# Altium PCB MB.PcbDoc
Units mm, origin at the board's own origin, x right, y up, seen from the top; angles counter-clockwise.
Board outline 125 x 96.25 mm, 2 copper layers (Top Layer, Bottom Layer); 31 components, 34 nets, 225 pads, 0 vias.
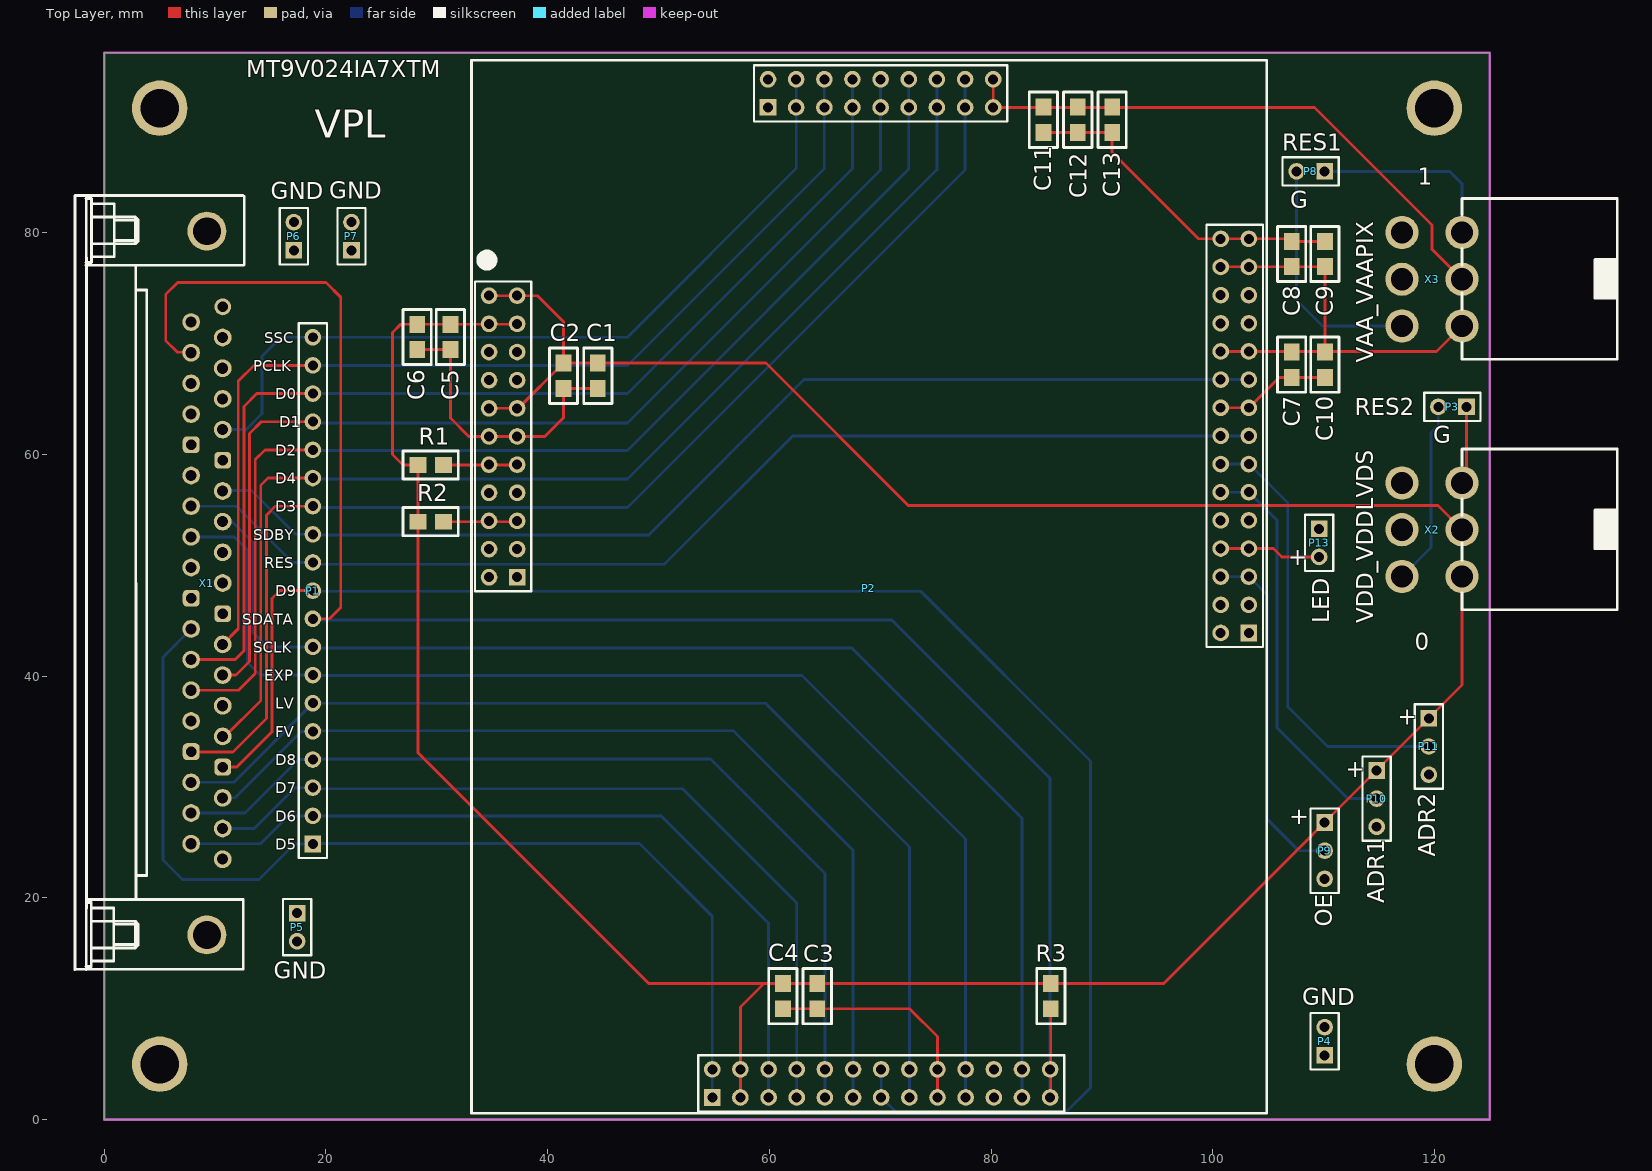
[diagram p0: Top Layer view]
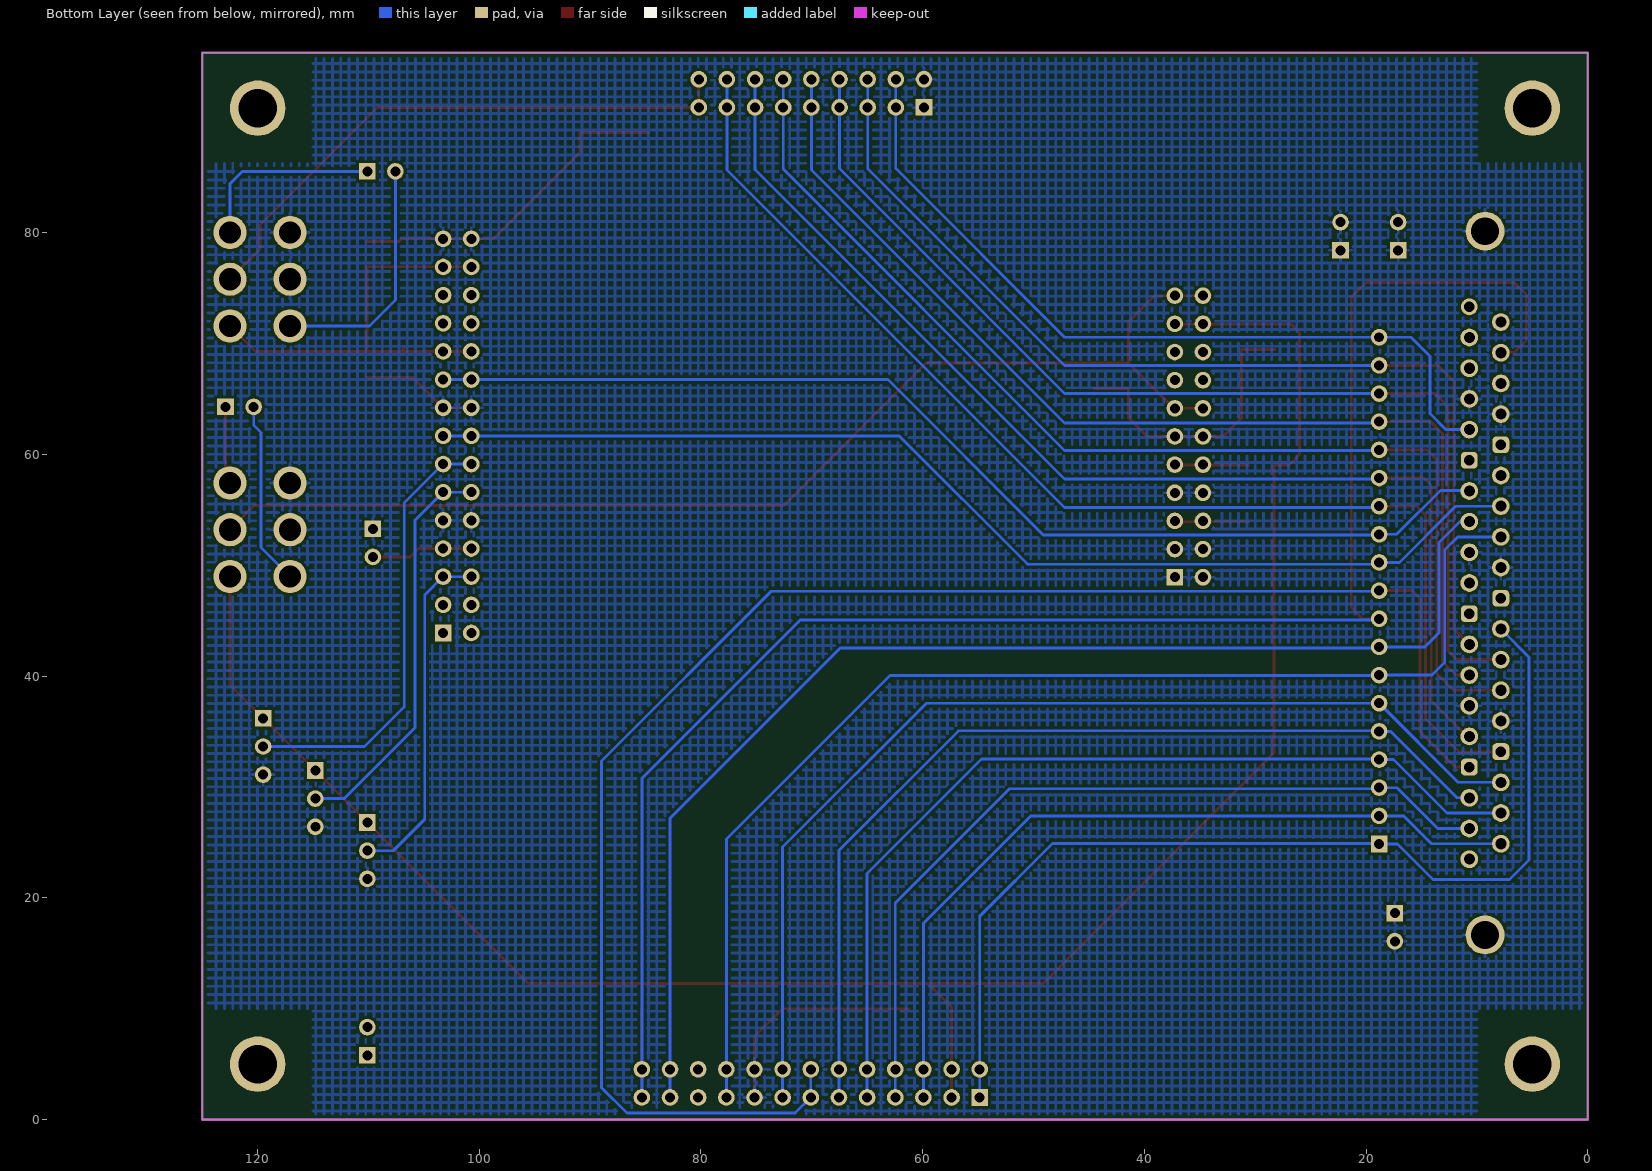
[diagram p1: Bottom Layer view, seen from below]

## Layer stack, top to bottom
Top Solder: solder mask 0.0102, Solder Resist, Dk 3.5
Top Layer: signal copper 0.0356
Dielectric 1: dielectric 0.32, FR-4, Dk 4.8
Bottom Layer: signal copper 0.0356
Bottom Solder: solder mask 0.0102, Solder Resist, Dk 3.5

## Board outline
0,0 125,0 125,96.25 0,96.25

## Design rules (kind name [scope] priority, off if disabled: settings)
Clearance [All] p1: gap=0.254
PolygonConnect [All] p1: connectstyle=Relief reliefconductorwidth=0.254 reliefentries=4 polygonreliefangle="90 Angle" airgapwidth=0.254
RoutingVias [All] p1: holewidth=0.711 width=1.27 viastyle="Through Hole" minholewidth=0.711 minwidth=1.27 maxholewidth=0.711 maxwidth=1.27
SolderMaskExpansion [All] p1: expansion=0.102
Width [All] p1: maxlimit=0.254 minlimit=0.254 preferedwidth=0.254
29 further rules are at their usual default settings.

## Components (designator, comment, footprint, x,y, rotation, side; value= is the part's Value field where it differs from the comment)
C1 "0,1 мк" CAP_SMALL 45.8,64.6 r90 top
C2 "0,1 мк" CAP_SMALL 42.7,64.6 r90 top
C3 "0,1 мк" CAP_SMALL 65.595,8.631 r90 top
C4 "0,1 мк" CAP_SMALL 62.495,8.631 r90 top
C5 "0,1 мк" CAP_SMALL 32.5,68.1 r90 top
C6 "0,1 мк" CAP_SMALL 29.5,68.1 r90 top
C7 "0,1 мк" CAP_SMALL 108.4,65.6 r90 top
C8 "0,1 мк" CAP_SMALL 105.86,80.6 r270 top
C9 "0,1 мк" CAP_SMALL 108.86,80.6 r270 top
C10 "0,1 мк" CAP_SMALL 111.4,65.6 r90 top
C11 "0,1 мк" CAP_SMALL 86,87.7 r90 top
C12 "0,1 мк" CAP_SMALL 89.1,87.7 r90 top
C13 "1 мк" CAP_SMALL 92.2,87.7 r90 top
P1 "Header 19" HDR1X19 18.81,24.863 r90 top
P2 "MEZ_MT9V024IA7XTM" MEZ_MT9V024IA7XTM 34.71,74.332 r0 top
P3 "RES2" HDR1X2 122.9,64.3 r180 top
P4 "GND" HDR1X2 110.1,5.8 r90 top
P5 "GND" HDR1X2 17.4,18.626 r270 top
P6 "GND" HDR1X2 17.1,78.426 r90 top
P7 "GND" HDR1X2 22.3,78.426 r90 top
P8 "RES1" HDR1X2 110.109,85.547 r180 top
P9 "OE" HDR1X3 110.1,26.8 r270 top
P10 "ADR1" HDR1X3 114.8,31.5 r270 top
P11 "ADR2" HDR1X3 119.5,36.2 r270 top
P13 "LED" HDR1X2 109.6,53.3 r270 top
R1 "1к" RES 26.966,60.3 r270 top
R2 "1к" RES 31.93,52.7 r90 top
R3 "1,5к" RES 86.639,13.62 r180 top
X1 "CHEAP_CON_37_FEMALE" CHEAP_CONN_FEMALE 9.26,16.659 r90 top
X2 "VDD_VDDLVDS" POWER 122.5,49 r270 top
X3 "VAA_VAAPIX" POWER 122.5,71.6 r270 top

## Footprints (in the part's own frame and the unit in brackets; to place one, negate y for a bottom-side part, rotate by r counter-clockwise, add the part's x,y. Pads: shape width x height; smd on the part's side, far side on the other; paste and mask are expansions set on the pad)
CAP_SMALL [mil] "FROM_MAX"
  rect 60x55.98 smd: 1(53.71,50) 2(143.71,50)
  silkscreen extent 1,0 197,100, body extent 20,18 178,82, height 100
CHEAP_CONN_FEMALE [mm] "CHEAP_CONN_FEMALE"
  round 1.6 hole 1: 1(6.833,-1.422) 2(9.601,-1.422) 3(12.37,-1.422) 5(17.907,-1.422) 6(20.676,-1.422) 7(23.444,-1.422) 8(26.213,-1.422) 10(31.75,-1.422) 11(34.519,-1.422) 12(37.287,-1.422) 13(40.056,-1.422) 15(45.593,-1.422) 16(48.362,-1.422) 17(51.13,-1.422) 18(53.899,-1.422) 20(8.23,1.422) 21(10.998,1.422) 22(13.767,1.422) 24(19.304,1.422) 25(22.073,1.422) 26(24.841,1.422) 27(27.61,1.422) 29(33.147,1.422) 30(35.916,1.422) 31(38.684,1.422) 32(41.453,1.422) 34(46.99,1.422) 35(49.759,1.422) 36(52.527,1.422) 37(55.296,1.422)
  rrect50% 1.524x1.524 hole 0.965: 4(15.138,-1.422) 9(28.981,-1.422) 14(42.824,-1.422) 23(16.535,1.422) 28(30.378,1.422) 33(44.221,1.422)
  round 1.524 hole 0.965: 19(56.667,-1.422)
  round 3.5 hole 2.5: 38(0,0) 39(63.5,0)
  silkscreen extent -3.11,-3.36 66.72,11.92
HDR1X2 [mm] "Connector; Header; 2 Position"
  rect 1.5x1.5 hole 0.9: 1(0,0)
  round 1.5 hole 0.9: 2(2.54,0)
  silkscreen extent -1.27,-1.27 3.81,1.27
HDR1X3 [mm] "Connector; Header; 3 Position"
  rect 1.5x1.5 hole 0.9: 1(0,0)
  round 1.5 hole 0.9: 2(2.54,0) 3(5.08,0)
  silkscreen extent -1.27,-1.27 6.35,1.27
HDR1X19 [mm] "Connector; Header; 19 Position"
  rect 1.5x1.5 hole 0.9: 1(0,0)
  round 1.5 hole 0.9: 2(2.54,0) 3(5.08,0) 4(7.62,0) 5(10.16,0) 6(12.7,0) 7(15.24,0) 8(17.78,0) 9(20.32,0) 10(22.86,0) 11(25.4,0) 12(27.94,0) 13(30.48,0) 14(33.02,0) 15(35.56,0) 16(38.1,0) 17(40.64,0) 18(43.18,0) 19(45.72,0)
  silkscreen extent -1.27,-1.27 46.99,1.27
MEZ_MT9V024IA7XTM [mm]
  round 1.5 hole 0.9: 1(0,0) 1(2.54,0) 2(0,-2.54) 2(2.54,-2.54) 3(0,-5.08) 3(2.54,-5.08) 4(0,-7.62) 4(2.54,-7.62) 5(0,-10.16) 5(2.54,-10.16) 6(0,-12.7) 6(2.54,-12.7) 7(0,-15.24) 7(2.54,-15.24) 8(0,-17.78) 8(2.54,-17.78) 9(0,-20.32) 9(2.54,-20.32) 10(0,-22.86) 10(2.54,-22.86) 11(0,-25.4) 12(20.142,-69.797) 13(22.682,-72.337) 13(22.682,-69.797) 14(25.222,-72.337) 14(25.222,-69.797) 15(27.762,-72.337) 15(27.762,-69.797) 16(30.302,-72.337) 16(30.302,-69.797) 17(32.842,-72.337) 17(32.842,-69.797) 18(35.382,-72.337) 18(35.382,-69.797) 19(37.922,-72.337) 19(37.922,-69.797) 20(40.462,-72.337) 20(40.462,-69.797) 21(43.002,-72.337) 21(43.002,-69.797) 22(45.542,-72.337) 22(45.542,-69.797) 23(48.082,-72.337) 23(48.082,-69.797) 24(50.622,-72.337) 24(50.622,-69.797) 25(66.015,-30.429) 26(66.015,-27.889) 26(68.555,-27.889) 27(66.015,-25.349) 27(68.555,-25.349) 28(66.015,-22.809) 28(68.555,-22.809) 29(66.015,-20.269) 29(68.555,-20.269) 30(66.015,-17.729) 30(68.555,-17.729) 31(66.015,-15.189) 31(68.555,-15.189) 32(66.015,-12.649) 32(68.555,-12.649) 33(66.015,-10.109) 33(68.555,-10.109) 34(66.015,-7.569) 34(68.555,-7.569) 35(66.015,-5.029) 35(68.555,-5.029) 36(66.015,-2.489) 36(68.555,-2.489) 37(66.015,0.051) 37(68.555,0.051) 38(66.015,2.591) 38(68.555,2.591) 39(66.015,5.131) 39(68.555,5.131) 40(45.491,16.986) 40(45.491,19.526) 41(42.951,16.986) 41(42.951,19.526) 42(40.411,16.986) 42(40.411,19.526) 43(37.871,16.986) 43(37.871,19.526) 44(35.331,16.986) 44(35.331,19.526) 45(32.791,16.986) 45(32.791,19.526) 46(30.251,16.986) 46(30.251,19.526) 47(27.711,16.986) 47(27.711,19.526) 48(25.171,19.526)
  rect 1.5x1.5 hole 0.9: 11(2.54,-25.4) 12(20.142,-72.337) 25(68.555,-30.429) 48(25.171,16.986)
  silkscreen extent -1.58,-73.76 70.17,21.24
POWER [mm] "POWER"
  round 3 hole 2: 1(0,0) 2(-4.217,0) 3(-8.435,0) 4(0,-5.422) 5(-4.217,-5.422) 6(-8.435,-5.422)
  silkscreen extent -11.5,0 3,14
RES [mil] "FROM_MAX"
  rect 55.98x60 smd: 1(49,52.71) 2(49,142.71)
  silkscreen extent -1,0 99,196, body extent 17,19 81,177, height 100

## Part data
C1 C2 C3 C4 C5 C6 C7 C8 C9 C10 C11 C12 C13: library part CAP_SMALL
P1: "Header, 19-Pin"
P3 P4 P5 P6 P7 P8 P13: library part "Header 2", "Header, 2-Pin"
P9 P10 P11: library part "Header 3", "Header, 3-Pin"
R1 R2 R3: library part RES
X2 X3: library part POWER

## Free pads (board coordinates)
  round 5 hole 3.5: 0(5,5) 0(5,91.25) 0(120,5) 0(120,91.25)

## Nets (pads, with @x,y where several pads share a name; then routed paths per layer and width w, separated by ;. In a path a pad name is that pad's centre, name@x,y a point inside that pad or via, vN(x,y) a via of type N, cw(c..) or ccw(c..) an arc to the next point about the centre after c; other vN are vias at no path point)
DOUT0: P1.17 P2.45 X1.26 | length 99
  Top Layer w0.254: X1.26 7.851,41.514 11.811,41.514 12.598,42.302 12.598,64.349 13.753,65.503 P1.17
  Bottom Layer w0.254: P1.17 47.2,65.503 67.502,85.805 67.502,91.318 P2.45@67.502,93.858
DOUT1: P1.16 P2.44 X1.7 | length 98.5
  Top Layer w0.254: X1.7 11.873,40.103 13.106,41.337 13.106,61.911 14.159,62.963 P1.16
  Bottom Layer w0.254: P1.16@18.81,62.836 47.2,62.836 70.042,85.678 70.042,91.318 P2.44@70.042,93.858
DOUT2: P1.15 P2.43 X1.25 | length 103.7
  Top Layer w0.254: X1.25 12.102,38.732 13.614,40.244 13.614,59.548 14.489,60.423 P1.15
  Bottom Layer w0.254: P1.15@18.81,60.373 47.2,60.373 72.582,85.754 72.582,91.318 P2.43@72.582,93.858
DOUT3: P1.13 P2.41 X1.23 | length 110.6
  Top Layer w0.254: X1.23@7.837,33.158 11.608,33.158 14.63,36.18 14.63,54.519 15.455,55.343 P1.13
  Bottom Layer w0.254: P1.13@18.81,55.216 47.2,55.216 77.662,85.678 77.662,91.318 P2.41@77.662,93.858
DOUT4: P1.14 P2.42 X1.5 | length 105.1
  Top Layer w0.254: X1.5@10.782,34.466 14.122,37.806 14.122,57.237 14.769,57.883 P1.14
  Bottom Layer w0.254: P1.14@18.81,57.782 47.2,57.782 75.122,85.703 75.122,91.318 P2.42@75.122,93.858
DOUT5: P1.1 P2.12 X1.27 | length 92.6
  Bottom Layer w0.254: X1.27 5.283,41.715 5.283,23.43 7.061,21.652 13.945,21.652 17.156,24.863 P1.1 ; P1.1@18.81,24.914 48.289,24.914 54.853,18.35 54.853,4.534 P2.12@54.853,1.994
DOUT6: P1.2 P2.14 X1.20 | length 72.9
  Bottom Layer w0.254: X1.20@7.837,24.877 14.072,24.877 16.598,27.403 P1.2 50.244,27.403 59.933,17.715 59.933,4.534 P2.14@59.933,1.994
DOUT7: P1.3 P2.15 X1.2 | length 75.1
  Bottom Layer w0.254: X1.2 13.524,26.26 17.207,29.943 P1.3 ; P1.3@18.81,29.842 52.175,29.842 62.473,19.544 62.473,4.534 P2.15@62.473,1.994
DOUT8: P1.4 P2.16 X1.21 | length 83.7
  Bottom Layer w0.254: X1.21 12.686,27.657 17.512,32.483 P1.4 ; P1.4@18.81,32.534 54.689,32.534 65.013,22.211 65.013,4.534 P2.16@65.013,1.994
DOUT9: P1.10 P2.18 X1.4 | length 150.7
  Top Layer w0.254: X1.4 11.949,31.798 15.138,34.987 15.138,47.026 15.836,47.723 P1.10
  Bottom Layer w0.254: P1.10@18.81,47.673 73.663,47.673 88.976,32.36 88.976,2.87 86.69,0.584 71.503,0.584 70.093,1.994 P2.18@70.093,4.534
EXPOSURE: P1.7 P2.21 X1.30 | length 110.4
  Bottom Layer w0.254: X1.30 11.723,52.575 12.903,51.395 12.903,41.235 14.035,40.103 P1.7 ; P1.7@18.81,40.078 62.944,40.078 77.713,25.31 77.713,4.534 P2.21@77.713,1.994
FRAME_VALID: P1.5 P2.17 X1.3 | length 86.1
  Bottom Layer w0.254: X1.3 11.772,29.029 17.766,35.023 P1.5 ; P1.5@18.81,35.074 56.772,35.074 67.553,24.294 67.553,4.534 P2.17@67.553,1.994
GND: C1.1 C2.1 C3.1 C4.1 C5.1 C6.1 C7.1 C8.1 C9.1 C10.1 C11.1 C12.1 C13.1 P2.6 P2.8 P2.10 P2.11 P2.20 P2.29 P2.33 P2.39 P2.48 P5.1 P5.2 P6.1 P6.2 P7.1 P7.2 P9.3 P10.3 P11.3 P13.1 X1.6 X1.11 X1.16 X1.24 X1.29 X1.34 X1.38 X1.39 X2.5 X2.6 X3.5 X3.6 | length 88
  Top Layer w0.254: C6.1 C5.1 31.23,63.283 32.882,61.632 34.71,61.632 37.25,61.632 39.737,61.632 41.43,63.325 C2.1 C1.1 ; C4.1 C3.1 72.656,9.995 75.173,7.479 75.173,4.534 P2.20@75.173,1.994 ; C11.1 C12.1 C13.1 90.93,87.27 98.737,79.463 100.725,79.463 103.265,79.463 107.043,79.463 107.27,79.236 C9.1 ; P2.33@100.725,64.223 103.265,64.223 106.007,66.964 C7.1 C10.1
LED_OUT: P2.28 P13.2 | length 9.2
  Top Layer w0.254: P2.28@100.725,51.523 103.265,51.523 105.477,51.523 106.24,50.76 P13.2
LINE_VALID: P1.6 P2.19 X1.22 | length 95.7
  Bottom Layer w0.254: X1.22@7.837,30.44 11.687,30.44 P1.6 59.668,37.563 72.633,24.599 72.633,4.534 P2.19@72.633,1.994
NetP2_7: P2.7 R1.2 | length 6.7
  Top Layer w0.254: R1.2 37.214,59.055 P2.7@37.25,59.092
NetP2_9: P2.9 R2.1 | length 6.7
  Top Layer w0.254: R2.1 37.183,53.945 P2.9@37.25,54.012
NetP2_27: P2.27 P9.2 | length 31.5
  Bottom Layer w0.254: P2.27@100.725,48.983 103.265,48.983 104.927,47.32 104.927,27.102 107.769,24.26 P9.2
NetP2_30: P2.30 P10.2 | length 36.5
  Bottom Layer w0.254: P2.30@100.725,56.603 103.265,56.603 105.791,54.077 105.791,35.357 112.188,28.96 P10.2
NetP2_31: P2.31 P11.2 | length 40.1
  Bottom Layer w0.254: P2.31@100.725,59.143 103.265,59.143 106.782,55.626 106.782,37.236 110.358,33.66 P11.2
NetP3_1: P3.1 X2.3 | length 7
  Top Layer w0.254: X2.3 122.9,57.835 P3.1
NetP3_2: P3.2 X2.4 | length 16.7
  Bottom Layer w0.254: X2.4 119.685,51.607 119.685,62.001 120.36,62.677 P3.2
NetP8_1: P8.1 X3.3 | length 17.3
  Bottom Layer w0.254: P8.1 121.387,85.547 122.5,84.434 X3.3
NetP8_2: P8.2 X3.4 | length 22.1
  Bottom Layer w0.254: P8.2 107.569,73.939 109.908,71.6 X3.4
PIXCLK: P1.18 P2.46 X1.8 | length 93.2
  Top Layer w0.254: X1.8 12.09,44.28 12.09,66.635 13.499,68.043 P1.18
  Bottom Layer w0.254: P1.18 47.2,68.043 64.962,85.805 64.962,91.318 P2.46@64.962,93.858
RESET_BAR: P1.11 P2.32 X1.31 | length 102.3
  Bottom Layer w0.254: X1.31 7.849,55.332 11.913,55.332 16.981,50.263 P1.11 ; P1.11@18.81,50.111 50.543,50.111 62.114,61.683 100.725,61.683 P2.32@103.265,61.683
SCLK: P1.8 P2.23 X1.12 | length 113.1
  Bottom Layer w0.254: X1.12 11.521,53.946 13.411,52.057 13.411,43.927 14.695,42.643 P1.8 ; P1.8@18.81,42.542 67.44,42.542 82.793,27.189 82.793,4.534 P2.23@82.793,1.994
SDATA: P1.9 P2.24 R3.2 X1.36 | length 163.9
  Top Layer w0.254: X1.36 7.798,69.226 6.604,69.226 5.537,70.293 5.537,74.433 6.629,75.525 20.004,75.525 21.336,74.193 21.336,46.188 20.331,45.183 P1.9 ; P2.24@85.333,1.994 85.395,2.057 R3.2
  Bottom Layer w0.254: P1.9@18.81,45.082 71.047,45.082 85.333,30.796 85.333,4.534 P2.24@85.333,1.994
STANDBY: P1.12 P2.34 X1.13 | length 100
  Bottom Layer w0.254: X1.13 10.721,56.754 13.284,56.754 17.235,52.803 P1.12 ; P1.12@18.81,52.753 49.12,52.753 63.13,66.763 100.725,66.763 P2.34@103.265,66.763
SYSCLK: P1.19 P2.47 X1.15 | length 72.6
  Bottom Layer w0.254: X1.15 10.696,62.266 12.802,62.266 14.224,63.689 14.224,68.87 15.937,70.583 P1.19 47.2,70.583 62.422,85.805 62.422,91.318 P2.47@62.422,93.858
VAA: C7.2 C8.2 C9.2 C10.2 P2.35 P2.38 X3.1 | length 40.4
  Top Layer w0.254: P2.35@100.725,69.303 103.265,69.303 C7.2@107.078,69.303 ; P2.38@100.725,76.923 100.752,76.95 C8.2 C9.2 C10.2@110.13,69.303 ; C7.2@106.77,69.61 C7.2@107.078,69.303 ; C7.2 C7.2@107.078,69.303 ; C10.2 C10.2@110.13,69.303 ; X3.1 120.203,69.303 C10.2@110.13,69.303 ; C7.2@107.078,69.303 C10.2@110.13,69.303
VAAPIX: C11.2 C12.2 C13.2 P2.40 X3.2 | length 52.5
  Top Layer w0.254: P2.40@80.202,93.858 80.202,91.318 109.182,91.318 119.8,80.7 119.8,78.517 X3.2
VDD: C3.2 C4.2 C5.2 C6.2 P2.2 P2.13 P9.1 P10.1 P11.1 R1.1 R2.2 R3.1 X2.1 | length 187.9
  Top Layer w0.254: P2.2@37.25,71.792 37.209,71.75 C5.2 C6.2 26.75,71.75 26,71 26,60 26.945,59.055 R1.1 R2.2 28.305,33.095 49.119,12.281 C4.2 ; P2.13@57.393,1.994 57.393,4.534 57.393,10.149 59.525,12.281 C4.2 ; X2.1 122.5,39.2 95.581,12.281 R3.1 C3.2 C4.2
VDDLVDS: C1.2 C2.2 P2.1 P2.5 X2.2 | length 107.2
  Top Layer w0.254: P2.5@34.71,64.172 37.25,64.172 37.352,64.172 C2.2 ; P2.1@34.729,74.35 34.71,74.332 37.25,74.332 39.079,74.332 41.43,71.981 C2.2 ; X2.2 120.317,55.4 72.54,55.4 59.69,68.25 C1.2 C2.2
pads on no net: P2.3 P2.4 P2.22 P2.25 P2.26 P2.36 P2.37 P4.1 P4.2 X1.1 X1.9 X1.10 X1.14 X1.17 X1.18 X1.19 X1.28 X1.32 X1.33 X1.35 X1.37

## Polygon pours and split planes (outlines as drawn)
GND on Bottom Layer "Top Layer-No Net" (hatched 90Degree grid 0.75 track 0.254, remove dead copper, pour order 3): 0.5,95.75 124.5,95.75 124.5,0.5 0.5,0.5

## Keep-outs
Keep-Out Layer:
  the board outline again, w0.254

## Other copper
Bottom Layer:
  pour cut-out: 0,10 10,10 10,0 0,0
  pour cut-out: 115,10 125,10 125,0 115,0
  pour cut-out: 115,96.25 125,96.25 125,86.25 115,86.25
  pour cut-out: 0,96.25 10,96.25 10,86.25 0,86.25

## Silkscreen, mask and mechanical layers (free items; w line width, h text height)
Top Overlay:
  text "MT9V024IA7XTM" at 12.81,94.044 h1.52
  text "VPL" at 18.974,88.595 h2.52
  text "1" at 118.5,84.35 h1.52
  text "G" at 106.985,82.22 h1.52
  text "SSC" at 14.444,70.064 h1
  text "PCLK" at 13.444,67.524 h1
  text "D0" at 15.443,64.984 h1
  text "D1" at 15.776,62.444 h1
  text "G" at 119.9,61 h1.52
  text "D2" at 15.443,59.904 h1
  text "D4" at 15.443,57.364 h1
  text "D3" at 15.443,54.824 h1
  text "SDBY" at 13.444,52.284 h1
  text "+" at 106.8,50 h1.52
  text "RES" at 14.444,49.744 h1
  text "D9" at 15.443,47.204 h1
  text "SDATA" at 12.444,44.664 h1
  text "0" at 118.246,42.35 h1.52
  text "SCLK" at 13.444,42.124 h1
  text "EXP" at 14.444,39.584 h1
  text "LV" at 15.443,37.044 h1
  text "+" at 116.7,35.6 h1.52
  text "FV" at 15.443,34.504 h1
  text "D8" at 15.443,31.964 h1
  text "+" at 112,30.9 h1.52
  text "D7" at 15.443,29.424 h1
  text "D6" at 15.443,26.884 h1
  text "+" at 108.5,26.4 h1.52 r90
  text "D5" at 15.443,24.344 h1